# Altium PCB Cat_v1.PcbDoc (part 2 of 2)
Units mil, origin at the board's own origin, x right, y up, seen from the top; angles counter-clockwise.
Board outline 3347.94 x 3903.41 mil, 2 copper layers (Top, Bottom), stack 61.811 mil thick; 108 components, 71 nets, 321 pads, 652 vias.
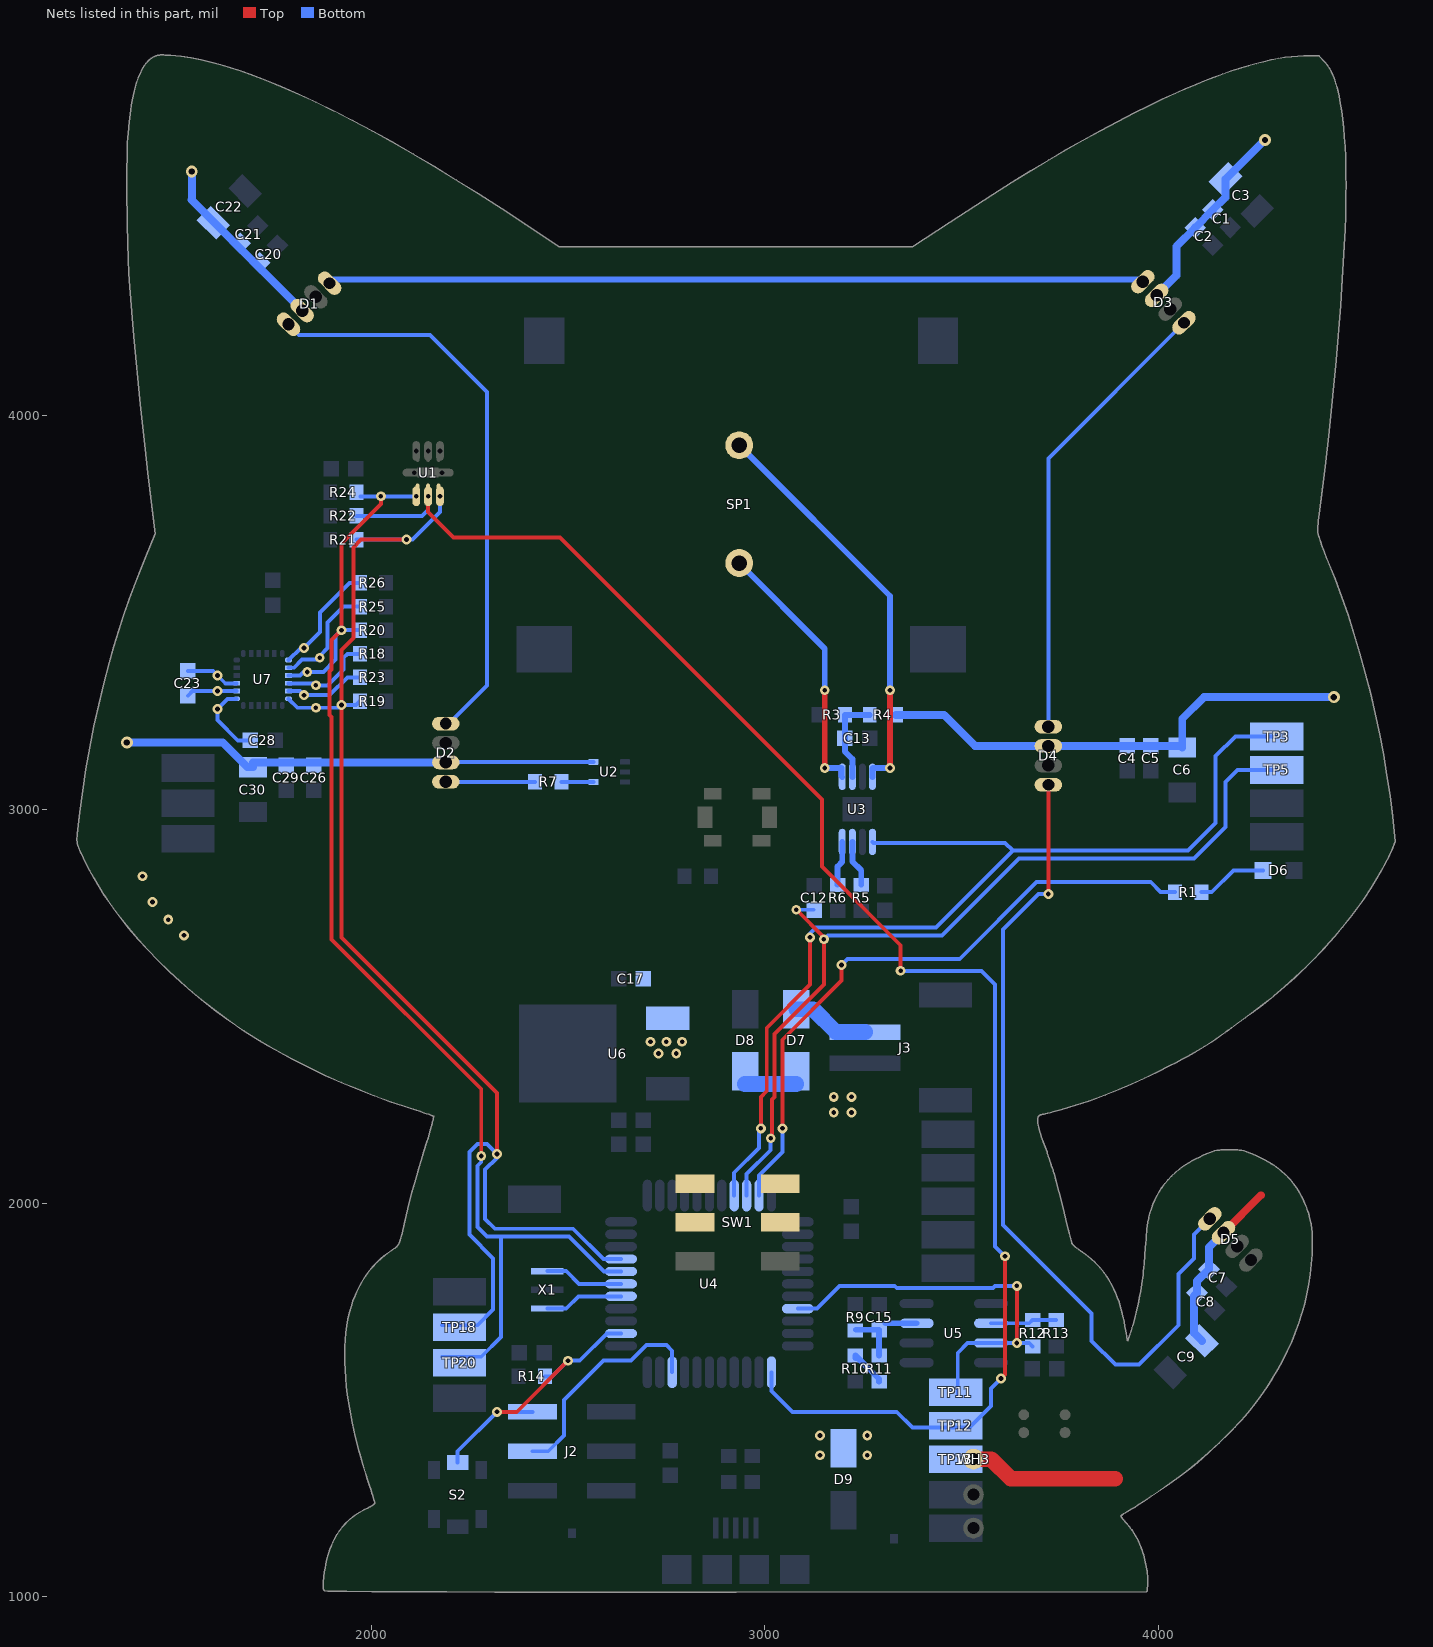
[diagram p2: the nets of this part, all layers, seen from the top]

## Via types
v1: diameter 25, hole 12, Top to Bottom, tented both sides, 618 vias
v2: diameter 25, hole 12, Top to Bottom, tented top, 22 vias
v3: diameter 30, hole 16, Top to Bottom, tented both sides, 4 vias
v4: diameter 35, hole 20, Top to Bottom, tented top, 4 vias
v5: diameter 27.56, hole 27.56, Top to Bottom, tented both sides, 2 vias
v6: diameter 35, hole 20, Top to Bottom, tented both sides, 1 vias
v7: diameter 190, hole 190, Top to Bottom, 1 vias

## Nets (pads, with @x,y where several pads share a name; then routed paths per layer and width w, separated by ;. In a path a pad name is that pad's centre, name@x,y a point inside that pad or via, vN(x,y) a via of type N, cw(c..) or ccw(c..) an arc to the next point about the centre after c; other vN are vias at no path point) (continued)
NetC13_2: C13.2 R3.2 R4.2 U3.6 | length 228.2
  Bottom w10: R3.2@3203.46,3240 R3.2@3203.46,3240
  Bottom w15: R3.2@3203.46,3240 R4.2@3266.54,3240 ; R3.2@3203.46,3240 C13.2@3203.5,3180 3203.5,3146.5 3222.2,3127.8 U3.6@3222.2,3082.68
NetC15_2: C15.2 R9.2 R11.1 U5.3 | length 202.1
  Bottom w15: R9.2@3231.97,1678.5 C15.2@3290,1678.5 R11.1@3290,1613.46 ; C15.2@3306.5,1695 U5.3@3385.51,1695
NetC23_1: C23.1 U7.8 | length 129
  Bottom w10: C23.1@1535,3288.5 1546.97,3300.47 U7.8@1659.06,3300.47
  other v2: 1610,3300.47
NetC23_2: C23.2 U7.9 | length 137
  Bottom w10: C23.2@1535,3351.5 1598.5,3351.5 1629.84,3320.16 U7.9@1659.06,3320.16
  other v2: 1610,3340
NetC28_2: C28.2 U7.7 | length 193
  Bottom w10: U7.7@1659.06,3280.79 1635.79,3280.79 v2(1610,3255) 1610,3226.63 1661.63,3175 C28.2@1693.5,3175
NetD1_1: D1.1 D2.4 | length 1469.2
  Bottom w10: D1.1@1790.45,4231.8 1817.25,4205 2150,4205 2295,4060 2295,3315 D2.4@2190,3210
NetD1_4: D1.4 D3.1 | length 2070.9
  Bottom w15: D1.4@1899.84,4341.2 D1.4@1894.84,4336.2 1903.64,4345 D3.1@3955,4345
NetD2_1: D2.1 R7.2 | length 226.5
  Bottom w10: D2.1@2190,3070 R7.2@2416.54,3070
NetD3_4: D3.4 D4.1 | length 1168.3
  Bottom w10: D4.1@3720,3210 3720,3891.21 D3.4@4064.4,4235.6
NetD4_4: D4.4 D5.1 | length 2157.3
  Top w10: v1(3720,2785) D4.4@3720,3062.36
  Bottom w10: v1(3720,2785) 3695,2785 3605,2695 3605,1945 3830,1720 3830,1650 3890,1590 3950,1590 4050,1690 4050,1820 4090,1860 4090,1920 D5.1@4130,1960
NetD6_A: D6.A R1.1 | length 179.9
  Bottom w10: R1.1@4108.46,2790 4135,2790 4190,2845 D6.A@4265.63,2845
NetD7_A: D7.A J3.2 | length 198.3
  Bottom w40: D7.A@3080,2492.26 3122.74,2492.26 3180.63,2434.37 J3.2@3254.33,2434.37
NetR5_2: R5.2 U3.3 | length 118.3
  Bottom w15: U3.3@3222.2,2917.32 3222.2,2867.8 3245,2845 R5.2@3245,2808.46
NetR6_2: R6.2 U3.4 | length 113.7
  Bottom w15: R6.2@3185,2808.46 3185,2855 3196.61,2866.61 U3.4@3196.61,2917.32
NetR7_1: R7.1 U2.4 | length 80.6
  Bottom w10: R7.1@2484.05,3069.41 U2.4@2564.65,3069.41
NetR10_2: R10.2 R11.2 | length 98.7
  Bottom w15: R10.2@3230,1606.54 R10.2@3230,1613.46 3290,1553.46 R11.2@3290,1546.54
NetR12_1: R12.1 R13.2 U5.6 | length 169
  Bottom w10: U5.6@3574.49,1695 3671.54,1695 R12.1@3680,1703.46 R13.2@3740,1703.46
NetR18_1: R18.1 U7.22 | length 238.4
  Top w10: v2@1860,3310 v2(1860,3315)
  Bottom w10: U7.22@1790.94,3320.16 1854.84,3320.16 v2(1860,3315) 1890,3315 1930,3355 1930,3385 1940,3395 R18.1@1971.54,3395
NetR23_1: R23.1 U7.23 | length 203.6
  Bottom w10: U7.23@1790.94,3300.47 1819.53,3300.47 v2(1830,3290) 1895,3290 1940,3335 R23.1@1971.54,3335
NetR25_1: R25.1 U7.20 | length 286
  Bottom w10: U7.20@1790.94,3359.53 1804.53,3359.53 1825,3380 1865,3380 v2(1870,3385) 1870,3390 1890,3410 1890,3475 1930,3515 R25.1@1971.54,3515
NetR26_1: R26.1 U7.19 | length 291
  Bottom w10: U7.19@1790.94,3379.21 1821.73,3410 v2(1830,3410) 1870,3450 1870,3500 1945,3575 R26.1@1971.54,3575
NetSP1_1: SP1.1 U3.8 | length 1043.8
  Top w15: v1(3317.68,3105) v1(3317.68,3302.32)
  Bottom w15: SP1.1@2935,3924.61 3317.68,3541.93 v1(3317.68,3302.32) ; U3.8@3273.39,3082.68 3273.39,3103.39 3275,3105 v1(3317.68,3105)
NetSP1_2: SP1.2 U3.5 | length 676.5
  Top w15: v1(3152.32,3105) v1(3152.32,3302.32)
  Bottom w15: SP1.2@2935,3625 SP1.2@2935,3625.39 3152.32,3408.07 v1(3152.32,3302.32) ; v1(3152.32,3105) 3195,3105 3195,3084.29 U3.5@3196.61,3082.68
NetU4_16: U4.16 X1.1 | length 199.6
  Bottom w10: X1.1@2448,1732.76 2495.76,1732.76 2526.5,1763.5 U4.16@2634.89,1763.5
NetU4_17: U4.17 X1.3 | length 200.2
  Bottom w10: X1.3@2448,1827.24 2495.76,1827.24 2528,1795 U4.17@2634.89,1795
OPT_INT: pad.1@2145,3795 R22.1 TP12.1 U1.5 U4.1 | length 4104.3
  Top w10: pad.1@2145,3795 2145,3755 2210,3690 2480,3690 3145,3025 3145,2855 3345,2655 v1(3345,2590) ; v1@3600,1550 v1(3600,1555) 3610,1565 v1(3610,1865)
  Bottom w10: R22.1@1963.46,3745 2130,3745 2145,3760 pad.1@2145,3795 ; U4.1@3016.78,1570.59 3016.78,1523.22 3070,1470 3335,1470 3375,1430 3520,1430 3574.5,1484.5 3574.5,1529.5 v1(3600,1555) ; v1(3345,2590) 3550,2590 3585,2555 3585,1890 v1(3610,1865)
RESET: J2.5 R14.1 S2.2 U4.13 | length 732.2
  Top w10: v1(2320,1470) 2370,1470 v1(2500,1600)
  Bottom w10: S2.2@2220,1341.69 2220,1370 v1(2320,1470) J2.5@2410,1470 ; R14.1@2441.46,1560 2460,1560 v1(2500,1600) 2530,1600 2599.02,1669.02 U4.13@2634.89,1669.02
SCK: J2.3 U4.9 | length 580.1
  Bottom w10: J2.3@2410,1370 2450,1370 2490,1410 2490,1500 2590,1600 2660,1600 2700,1640 2750,1640 2764.81,1625.19 U4.9@2764.81,1570.59
SCL: pad.1@2115,3795 R20.1 R24.1 TP20.1 U1.4 U4.18 U7.21 | length 3315.1
  Top w10: v1(2025,3795) 2025,3775 1925,3675 v1(1925,3455) 1900,3430 1900,3355 1895,3350 1895,3240 1900,3235 1900,2670 2280,2290 v1(2280,2120)
  Bottom w10: U7.21@1790.94,3339.84 1819.84,3339.84 1829,3349 v2(1838,3349) 1879,3349 1910,3380 1910,3440 v1(1925,3455) R20.1@1971.54,3455 ; R24.1@1973.46,3795 v1(2025,3795) pad.1@2115,3795 ; TP20.1@2180,1610 2280,1610 2330,1660 2330,1915 ; v1(2280,2120) 2280,2105 2270,2095 2270,1940 2295,1915 2330,1915 ; U4.18@2634.89,1826.5 2591.5,1826.5 2503,1915 2330,1915
SDA: pad.1@2175,3795 R19.1 R21.1 TP18.1 U1.6 U4.19 U7.24 | length 3561.6
  Top w10: v1(2090,3685) 1975,3685 1955,3665 1955,3435 1925,3405 v1(1925,3265) 1925,2675 2320,2280 v1(2320,2125)
  Bottom w10: U7.24@1790.94,3280.79 1813.73,3258 v2(1860,3258) 1918,3258 v1(1925,3265) 1961.54,3265 R19.1@1971.54,3275 ; R21.1@1963.46,3685 v1(2090,3685) 2105,3685 2175,3755 pad.1@2175,3795 ; TP18.1@2180,1690 2270,1690 2310,1730 2310,1860 2250,1920 2250,2130 2270,2150 2295,2150 v1(2320,2125) 2320,2115 2290,2085 2290,1960 2315,1935 2513,1935 2590.01,1857.99 U4.19@2634.89,1857.99
SOUND: R12.2 TP11.1 U4.41 U5.7 | length 1043.3
  Top w10: v1(3640,1645) v1(3640,1790)
  Bottom w10: U4.41@3083.71,1732.01 3132.01,1732.01 3190,1790 3330,1790 3335,1785 3580,1785 3585,1790 v1(3640,1790) ; TP11.1@3490,1510 3490,1620 3515,1645 U5.7@3574.49,1645 v1(3640,1645) 3671.54,1645 R12.2@3680,1636.54
SPEAKER: C12.1 TP5.1 U4.31 | length 2274.8
  Top w10: v1(3015,2165) 3018,2168 3018,2263 3025,2270 3025,2430 3150,2555 v1(3150,2670) 3150,2675 v1(3080,2745)
  Bottom w10: U4.31@2953.79,2019.41 2953.79,2073.79 3015,2135 v1(3015,2165) ; v1(3080,2745) C12.1@3123.5,2745 ; v1(3150,2670) 3160,2680 3450,2680 3645,2875 4090,2875 4170,2955 4170,3070 4200,3100 TP5.1@4300,3100
SPEAKER_EN: TP3.1 U3.1 U4.30 | length 2603
  Top w10: v1(2990,2190) 2990,2270 3005,2285 3005,2445 3115,2555 v1(3115,2675)
  Bottom w10: U4.30@2922.29,2019.41 2922.29,2077.29 2985,2140 2985,2185 v1(2990,2190) ; v1(3115,2675) 3115,2685 3130,2700 3435,2700 3630,2895 ; U3.1@3273.39,2917.32 3275.71,2915 3610,2915 3630,2895 ; TP3.1@4300,3185 4195,3185 4145,3135 4145,2965 4075,2895 3630,2895
USER_LED: R1.2 U4.32 | length 1616.3
  Top w10: v1(3045,2190) 3045,2415 3195,2565 v1(3195,2605)
  Bottom w10: U4.32@2985.28,2019.41 2985.28,2070.28 3045,2130 v1(3045,2190) ; v1(3195,2605) 3210,2620 3495,2620 3690,2815 3980,2815 4005,2790 R1.2@4041.54,2790
VCC: C1.1 C2.1 C3.1 C4.1 C5.1 C6.1 C7.1 C8.1 C9.1 C17.1 C20.1 C21.1 C22.1 C26.1 C29.1 C30.1 D1.2 D2.2 D3.2 D4.2 D5.2 R4.1 SW1.3 SW1.6 TP13.1 U2.5 U6.1 WH3.1 | length 4258
  Top w20: D5.2@4164.8,1925.2 4259.6,2020
  Top w40: WH3.1@3530,1350 3575,1350 3625,1300 3890,1300
  Bottom w10: D2.2@2191.38,3120.59 U2.5@2564.65,3120.59
  Bottom w20: v3(1380,3170) 1623.37,3170 1686.28,3107.09 C30.1@1700,3107.09 ; v3(1545,4620) 1545,4549 1543.92,4547.92 D1.2@1825.25,4266.6 ; C30.1@1700,3119.21 D2.2@2190,3119.21 ; R4.1@3333.46,3240 3455,3240 3534.21,3160.79 D4.2@3720,3160.79 C6.1@4060,3160.79 ; D3.2@3994.8,4305.2 4045,4355.4 4045,4429.54 C2.1@4092.73,4477.27 C1.1@4137.73,4522.27 4169.63,4554.18 C3.1@4169.63,4600.37 4269.27,4700 v3(4270,4700) ; C6.1@4060,3157.09 C6.1@4060,3160.79 ; C9.1@4110.37,1650.37 4090,1670.73 4090,1764.54 C8.1@4097.73,1772.27 4097.73,1802.27 C7.1@4127.73,1832.27 4127.73,1888.13 D5.2@4164.8,1925.2 ; v3(4445,3285) 4115,3285 4060,3230 C6.1@4060,3160.79
  other v1: 2730,2380 2775,2380 2710,2410 2750,2410 2790,2410 1525,2680 1485,2720 1445,2765 1420,2830
VIN: D7.K D8.K D9.K SW1.2 SW1.5 | length 130
  Bottom w40: D8.K@2950,2302.52 D7.K@3080,2302.52
  other v1: 3140,1360 3260,1360 3140,1410 3260,1410 3175,2230 3220,2230 3175,2270 3220,2270
pads on no net: D5.4 J1.4 SW1.1 SW1.4 U1.7 U3.2 U4.2
copper on no net: | length 756.6
  Top w1: 3060.42,4180 ccw(c2940,4180) 3060.42,4180
  other v5: 2844.61,1166.14 3007.99,1166.14
  other v7: 2940,4180

## Polygon pours and split planes (outlines as drawn)
GND on Bottom "GND_L02_P056" (solid, remove dead copper, pour order 62): 1116 vertices, not listed, extent 1256.11,1015.17 4598.35,4912.88
3.3V on Bottom "3.3V_L02_P060" (solid, pour order 60): 1710,3385 1770,3385 1790,3405 1790,3530 1710,3530
GND on Bottom "GND_L02_P059" (solid, pour order 59): 1680,3275 1665,3260 1665,3210 1765,3210 1765,3275
3.3V on Bottom "3.3V_L02_P056" (solid, pour order 56): 2670,2355 2865,2355 2865,2233.76 2745,2113.91 2745,2090 2670,2090
GND on Bottom "GND_L02_P054" (solid, pour order 54): 3300,4275 3300,4100 3575,4100 3575,4275
VCC on Bottom "VCC_L02_P050" (solid, pour order 50): 2860,2525 2860,2670 2684.17,2845.83 1305.83,2845.83 1382.28,2732.39 1549.91,2570.99 1552.03,2765 2625,2765 2675,2715 2675,2525
3.3V on Bottom "3.3V_L02_P042" (solid, pour order 42): 2690,1960 3010,1960 3010,1637.52 2792.48,1637.52 2770,1660 2690,1660
GND on Bottom "GND_L02_P036" (solid, pour order 36): 2330,1130 2110.6,1130 2110.6,1380 2330,1380
GND on Bottom "GND_L02_P034" (solid, pour order 34): 2890,1150 2890,1220 2869.26,1240 2740,1240 2690,1190 2690,1027.32 3270,1027.32 3270,1120.59 2890,1120.59
VCC on Bottom "VCC_L02_P032" (solid, pour order 32): 2860,2550 2670,2550 2670,2365.29 2860,2365.29
VIN on Bottom "VIN_L02_P024" (solid, pour order 24): 2935,2412.61 3140,2412.61 3140,2300 3270,2300 3270,2208.86 2935,2209.42
GND on Bottom "GND_L02_P010" (solid, pour order 10): 2578,1740 2506.72,1668.72 2350,1668.72 2350,1885.92 2507.08,1885.92 2578,1815
5V on Bottom "5V_L02_P014" (solid, pour order 14): 2969,1130 2969,1219.27 2989.85,1240.12 3270,1240.12 3270,1130
VIN on Bottom "VIN_L02_P020" (solid, pour order 20): 3130,1308.75 3270,1308.75 3270,1480 3130,1480
3.3V on Bottom "3.3V_L02_P006" (solid, pour order 6): 2000,3230 2110,3230 2110,3660.7 1940,3660.7 1940,3920 1840,3920 1840,3610 2000,3610
3.3V on Top "3.3V_L01_P008" (solid, pour order 8): 2820,2245 2885,2245 2885,2740.63 2127.34,3498.3 2124.95,3660.69 1980,3660.69 1980.01,3462.32 2504.34,2937.54 2534.12,2909.01 2820,2622.48
GND on Top "GND_L01_P012" (solid, pour order 12): 2796,1024 2796,1688.52 3091,1688.52 3091,1024
VIN on Top "VIN_L01_P010" (solid, pour order 16): 3130,1320 3270,1320 3270,2300 3140,2300 3140,2000 2710,2000 2710,1889.49 3130,1889.49
VCC on Top "VCC_L01_P014" (solid, pour order 22): 3130,2010.03 2690,2010.03 2690,2433.15 2815,2433.15 2815,2142.73 3130,2142.73
GND on Top "GND_L01_P034" (solid, remove dead copper, pour order 46): 484 vertices, not listed, extent 1419.67,1009.54 4436.48,4728.88
VCC on Top "VCC_L01_P036" (solid, remove dead copper, pour order 48): 1116 vertices, not listed, extent 1256.11,1015.17 4598.35,4912.88
no net on Top Solder "Top-No Net" (solid): 3665.54,1042 3878,1042 ccw(c3879.39,1052.84) 3887,1045 ccw(c3862.5,1100.29) 3922.97,1099.82 ccw(c3856.07,1098.58) 3918,1123.92 ccw(c3776.12,1050.19) 3842.98,1195.43 ccw(c3662.39,866.02) 3808.48,1212.12 ccw(c3803.16,1206.92) 3805.4,1214.01 ccw(c3784.57,1148.75) 3748.01,1206.68 ccw(c3751.9,1200.48) 3746.71,1205.64 cw(c3272.23,1685.75) 3718.49,1179.3 cw(c3335.2,1614.2) 3689.64,1155.48 cw(c3546.42,1363.73) 3655.25,1135.62 ccw(c3657.92,1129.9) 3654.61,1135.27 cw(c3639.17,1148.46) 3652.36,1133.02 ccw(c3707.06,1088.84) 3646.8,1052.6 ccw(c3665.54,1063.87)
no net on Top Solder "Top-No Net" (solid): 1979.87,1043.1 2192.03,1043.1 ccw(c2191.93,1070.06) 2211.03,1051.03 ccw(c2132.24,1089.68) 2217.76,1109.38 ccw(c2168.69,1099.91) 2194,1143 cw(c2304.97,1355.26) 2145,1177 cw(c2589.58,1687.81) 2110.34,1209.36 cw(c2112.97,1221.17) 2105.84,1211.4 ccw(c2089.39,1188.94) 2100.56,1214.44 ccw(c2073.51,1152.93) 2049.5,1215.69 ccw(c2051.65,1208.75) 2046.43,1213.8 ccw(c2191.37,870.02) 2011.93,1197.12 ccw(c2083.86,1050.17) 1936.9,1122.1 ccw(c1995.98,1103.04)

## Keep-outs
Keep-Out Layer:
  lines w30: 2660,1010 3250,1010
  lines w50: 1883.13,1018.67 cw(c1890.43,1023.16) 1881.86,1023.2 cw(c1932.78,1028.11) 1881.63,1027.36 cw(c1985.58,1029.12) 1881.67,1032.65 cw(c2054.07,1026.95) 1882,1038.97 cw(c2130.05,1021.75) 1882.61,1046.2 cw(c2204.2,1014.49) 1883.5,1054.26 cw(c2268.51,1006.56) 1884.69,1063.04 cw(c2334.63,996.68) 1887.97,1082.34 cw(c2130.35,1036.69) 1898.05,1119.59 cw(c2096.2,1048.39) 1904.97,1136.49 cw(c2072.97,1059.46) 1922.42,1166.67 cw(c2054.64,1072.69) 1986.36,1219.84 ccw(c1909.66,1384.2) 1998.55,1226.09 ccw(c1931.7,1344.59) 2002.03,1228.13 ccw(c1948.47,1316.88) 2005.13,1230.08 ccw(c1966.4,1289.48) 2007.8,1231.9 ccw(c1983.2,1266.2) 2009.96,1233.56 ccw(c1996.87,1249.63) 2011.58,1235.03 ccw(c2006.21,1240.47) 2012.59,1236.26 ccw(c2011.03,1237.37) 2012.94,1237.23 ccw(c1991.3,1234.9) 2012.2,1240.98 ; 1897.66,1017.83 1938,1017.13 ; 1943.34,1013.38 ccw(c1956.31,1112.33) 1957.87,1012.54 1998.21,1011.84 2062.17,1011.25 2147.58,1010.79 2252.25,1010.44 2374,1010.19 2510.64,1010.05 2660,1010 ; 3250,1010 3702.24,1010.45 3702.78,1009.91 3968.04,1010.18 3969.78,1034.44 ccw(c3879.73,1040.41) 3969.94,1043.1 ccw(c3818.12,1038.85) 3969.33,1053.08 ccw(c3749.36,1032.56) 3968.02,1064.07 ccw(c3650.01,1017.39) 3960.66,1099.89 ccw(c3652.98,1018.76) 3957.3,1111.71 ccw(c3699.61,1033.09) 3953.6,1122.95 ccw(c3793.29,1067.33) 3945.49,1142.36 ccw(c3823.56,1080.65) 3943.29,1146.51 ccw(c3783.97,1058.93) 3940.79,1150.91 ccw(c3723.15,1022.68) 3928.97,1169.15 ccw(c3743.19,1037.07) 3925.85,1173.43 ccw(c3774.85,1060.75) 3922.79,1177.42 ccw(c3829.72,1104.57) 3917.07,1184.18 cw(c4075.42,1330.17) 3911.98,1189.91 cw(c4058.81,1315.89) 3909.66,1192.65 cw(c4036.53,1297.51) 3907.55,1195.27 cw(c4008.29,1275.16) 3905.66,1197.7 cw(c3977.88,1252.24) 3904.05,1199.91 cw(c3949.47,1232.16) 3902.73,1201.86 cw(c3926.61,1217.39) 3901.75,1203.48 cw(c3906.32,1206.48) 3900.92,1205.61 cw(c3902.62,1205.51) 3901.15,1206.37 cw(c3906.29,1203.55) 3901.81,1207.33 cw(c3913.08,1197.98) 3902.87,1208.48 cw(c3922.78,1188.12) 3904.29,1209.78 cw(c3934.48,1174.49) 3906.03,1211.2 cw(c3946.75,1158.71) 3908.06,1212.71
  lines w60: 2012.2,1240.98 ccw(c1869.61,1204.83) 2011.32,1244.29 2010.14,1248.43 2008.69,1253.29 2007,1258.78 2005.1,1264.79 2003.03,1271.22 1998.46,1284.96 1993.28,1300.75 1990.48,1309.63 1987.61,1318.91 cw(c3759.47,1862.65) 1976.53,1356.4 1974.15,1364.95 1972.02,1372.79 cw(c3090.94,1675.63) 1943.09,1514.02 cw(c2727.41,1621.48) 1937,1577.11 cw(c2544.56,1611.38) 1936.5,1635.14 cw(c2404.7,1616.96) 1941.58,1688.07 cw(c2303.31,1632.58) 1952.22,1735.85 cw(c2235.62,1652.45) 1968.43,1778.47 cw(c2196.59,1670.71) 1990.19,1815.87 cw(c2181.24,1681.2) 2050.37,1874.87 ccw(c1871.77,2148.52) 2062.99,1883.53 ccw(c2037.8,1917.19) 2067.45,1887.38 ccw(c2043.97,1910.3) 2074.19,1897.52 ccw(c2004.08,1928.41) 2077.08,1905.16 ccw(c1895.1,1963.55) 2080.06,1915.41 ccw(c1541.05,2056.63) 2083.43,1928.97 2087.49,1946.49 2092.56,1968.67 cw(c3981.3,1536.64) 2100.44,2001.77 cw(c3709.24,1603.01) 2113.45,2051.03 2118.49,2068.69 2124.03,2087.53 2130.17,2107.9 2137.01,2130.11 2144.63,2154.51 ccw(c1109.05,2480.17) 2150.9,2175.16 2153.62,2184.66 2156.03,2193.43 2158.07,2201.31 ccw(c1819.99,2286.44) 2159.73,2208.17 ccw(c1972.66,2251.4) 2160.95,2213.87 ccw(c2080.34,2230.11) 2161.71,2218.25 ccw(c2139.64,2221.69) 2161.97,2221.18 ccw(c2159.97,2221.47) 2161.7,2222.52 ccw(c2150.13,2202.93) 2157.49,2224.45 ccw(c2082.15,2033.45) 2153.27,2226.06 2147.82,2228.04 2141.27,2230.34 2133.77,2232.91 2125.44,2235.7 2116.43,2238.67 2096.9,2244.96 cw(c2650.97,3985.65) 1761.18,2390.26 cw(c2495.05,3696.3) 1718.55,2415.15 cw(c2409.17,3554.8) 1678.14,2440.63 cw(c2311.29,3405.82) 1640.26,2466.57 cw(c2453.22,3607.34) 1461.39,2618.14 cw(c2301.49,3453.76) 1387.37,2699.83 cw(c2190.69,3361.22) 1354.8,2741.5 cw(c2107.89,3299.91) 1325.42,2783.47 cw(c2021.1,3242.71) 1299.39,2825.56 cw(c1933.11,3191.93) 1276.89,2867.59 cw(c2403.11,3427.76) 1266.38,2889.23 cw(c1535.45,3015.9) 1262.73,2897.3 cw(c1390.98,2953.18) 1260,2904.04 cw(c1331.45,2930.87) 1258.09,2909.82 cw(c1307.2,2923.87) 1256.89,2915 cw(c1306,2923.31) 1256.23,2925.07 cw(c1360.24,2922.05) 1256.54,2930.71 cw(c1563.66,2905.28) 1257.15,2937.24 cw(c3871.58,2674.83) 1338.09,3371.61 cw(c3568.03,2755.77) 1403.86,3573.25 cw(c3391.16,2820.75) 1429.34,3637.38 1455.35,3699.84 1451.52,3730.12 1436.13,3855.47 1429.29,3914.46 1416.94,4028.76 1400.62,4202.13 1395.46,4263.39 1390.31,4327.62 cw(c3210.4,4459.18) 1386.63,4396.64 1385.24,4439.52 1384.18,4485.43 1383.12,4578.63 cw(c6011.72,4595.32) 1383.16,4622.07 1383.63,4660.84 cw(c2953.5,4633.14) 1384.52,4693.02 cw(c1934.72,4673.36) 1385.88,4716.69 cw(c2339.94,4638.18) 1392.49,4775.01 cw(c2016.5,4683.66) 1396.7,4800.22 cw(c1853.94,4714.34) 1401.53,4822.82 cw(c1727.94,4744.67) 1406.98,4842.83 cw(c1633.29,4773.72) 1413.05,4860.25 cw(c1565.12,4800.62) 1419.75,4875.11 cw(c1518.8,4824.45) 1427.09,4887.43 cw(c1489.94,4844.32) 1435.06,4897.21 cw(c1474.37,4859.34) 1443.68,4904.48 cw(c1487.92,4840.47) 1450.74,4908.82 cw(c1467.1,4877.95) 1453.99,4910.33 cw(c1465.37,4881.9) 1461,4912.21 cw(c1467.81,4866.06) 1465.17,4912.63 cw(c1469.64,4833.98) 1470.07,4912.76 cw(c1469.34,4762.06) 1475.92,4912.62 cw(c1462.03,4590.3) 1482.91,4912.24 1491.27,4911.66 cw(c1434.63,4265.98) 1617.86,4887.7 cw(c1311.6,3810.05) 1691.35,4864.05 cw(c1163.94,3398.44) 1771.55,4832.66 cw(c949.69,2891.24) 1858.4,4793.56 cw(c658.97,2281.37) 1951.83,4746.78 cw(c282.59,1562.57) 2051.78,4692.34 cw(c-187.85,729.4) 2158.2,4630.29 cw(c-759.94,-222.68) 2271,4560.65 cw(c-1440.43,-1297.35) 2390.14,4483.45 2477.03,4425.91 2926.6,4425.91 3376.17,4425.91 3471.66,4488.64 3579.55,4558.44 3629.32,4589.76 3676.88,4619.04 3722.66,4646.52 cw(c5726.76,1265.03) 3810.58,4697.1 cw(c5610.08,1471.16) 3939.83,4765.88 cw(c5036.27,2611.16) 4045.29,4816.37 cw(c4827.53,3071.72) 4094.73,4837.71 cw(c4708.36,3359.21) 4141.83,4856.39 cw(c4607.59,3625.86) 4186.48,4872.37 cw(c4525.78,3868.45) 4228.56,4885.63 cw(c4462.83,4084.41) 4267.97,4896.11 cw(c4417.96,4271.96) 4304.6,4903.79 cw(c4389.73,4430.19) 4338.34,4908.63 cw(c4376.05,4559.07) 4369.08,4910.59 ; 3731.17,2234.72 ccw(c3459.91,3240.98) 3771.86,2246.58 ; 3731.18,2234.72 3723.87,2232.8 3717.18,2231.11 3711.26,2229.71 cw(c3663.3,2438.74) 3706.25,2228.62 cw(c3686.79,2323.13) 3702.29,2227.89 ccw(c3703.81,2214.51) 3691.39,2219.7 ccw(c3712.71,2211.08) 3689.74,2212.17 ccw(c3738.78,2209.51) 3690.12,2202.84 ccw(c3788.69,2215.93) 3692.17,2192.05 ccw(c3873.62,2236.54) 3695.49,2180.18 ccw(c4023.85,2283.73) 3699.73,2167.59 ccw(c4376.81,2409.89) 3704.51,2154.64 3709.45,2141.68 3714.17,2129.1 ccw(c3763.94,2136.95) 3715.81,2122.05 ccw(c3881.43,2170.33) 3717.24,2117.41 3718.95,2112.21 3720.88,2106.6 3722.95,2100.7 3725.06,2094.68 3727.14,2088.65 3729.1,2082.77 cw(c3451.9,1991.98) 3730.88,2077.17 cw(c3128.12,1895.93) 3734.88,2063.27 3737.33,2054.33 3740.01,2044.36 3742.86,2033.57 3745.82,2022.16 3757.65,1974.78 3765.59,1942.04 3767.97,1932.31 3770.15,1923.45 3772.08,1915.61 3773.74,1908.96 3775.07,1903.65 3776.04,1899.86 ccw(c3863.28,1922.29) 3776.62,1897.74 ccw(c3786.22,1901.28) 3778.38,1894.69 ccw(c3803.24,1913.97) 3779.98,1892.79 ccw(c3818.53,1927.79) 3781.99,1890.7 ccw(c3834.98,1944.42) 3784.36,1888.46 ccw(c3850.36,1961.38) 3787.04,1886.12 ccw(c3862.59,1975.87) 3789.99,1883.72 ccw(c3872.02,1987.9) 3799.92,1876.61 cw(c3676.96,1684.97) 3883.68,1780.44 cw(c3627.82,1659.32) 3892.67,1759.27 cw(c3590.94,1645.42) 3900.3,1736.53 cw(c3541.39,1630.82) 3906.59,1712.17 cw(c3477.09,1616.49) 3911.57,1686.17 ccw(c4899.83,1845.18) 3914.63,1668.17 3915.59,1662.94 3916.5,1658.24 3917.32,1654.15 3918.06,1650.76 ccw(c4005.67,1670.48) 3918.69,1648.15 ccw(c3943.92,1654.5) 3919.2,1646.4 ccw(c3921.64,1647.04) 3919.56,1645.61 ccw(c3916.25,1654.49) 3925.72,1654.33 ccw(c3742.67,1728.51) 3930.2,1666.52 ccw(c3481.57,1816.32) 3935.24,1682.57 ccw(c3177.09,1906.81) 3940.57,1701.45 ccw(c2951.94,1967.78) 3945.92,1722.16 ccw(c2960.83,1966.49) 3955.56,1764.96 ccw(c3288.08,1899.88) 3959.3,1785.01 ccw(c3561.09,1853.56) 3961.96,1802.81 ccw(c3230.86,1891.8) 3963.58,1817.38 3964.46,1826.16 3965.36,1835.69 3966.25,1845.76 3969.52,1887.47 3970.17,1897.26 cw(c4921.12,1838.47) 3971.92,1920.85 cw(c4526.95,1872.03) 3972.91,1930.98 cw(c4376.99,1888.01) 3974,1940.19 cw(c4279.93,1900.58) 3975.2,1948.61 cw(c4218.02,1910.33) 3976.56,1956.38 cw(c4180.54,1917.46) 3978.08,1963.63 cw(c4160.06,1922.11) 3983.85,1983.68 cw(c4213.16,1904.77) 3998.45,2017.52 cw(c4178.05,1922.92) 4017.41,2047.02 cw(c4178.6,1921.57) 4054.99,2084.17 cw(c4202.83,1891.09) 4070.18,2094.9 cw(c4222.7,1860.52) 4086.78,2104.91 cw(c4247.12,1816.6) 4104.87,2114.25 cw(c4413.62,1477.16) 4123.21,2122.82 cw(c4204.14,1941.13) 4130.4,2125.85 cw(c4172.11,2021.4) 4136.77,2128.17 cw(c4161.75,2052.54) 4142.72,2129.88 cw(c4161.35,2052.65) 4154.85,2131.83 cw(c4167.02,1990.57) 4161.8,2132.26 cw(c4172.6,1841.46) 4169.86,2132.45 4179.41,2132.49 cw(c4182.21,1668.46) 4197.07,2132.26 cw(c4191.9,1992.74) 4204.05,2131.83 cw(c4196.32,2043.73) 4210.32,2131.05 cw(c4198.04,2055.78) 4222.34,2128.07 cw(c4185.03,2016.27) 4228.88,2125.67 cw(c4149.85,1928.38) 4236.29,2122.54 cw(c4043.65,1689.29) 4244.98,2118.57 4255.33,2113.67 cw(c4127.23,1842.83) 4284.51,2097.84 cw(c4158.27,1894.25) 4297.45,2089.22 cw(c4177.98,1921.37) 4320.37,2070.27 cw(c4182.93,1927.69) 4356.02,2023.91 cw(c4142.18,1903.53) 4363.17,2010.21 cw(c4115.82,1889.56) 4373.96,1984.97 cw(c4172.45,1910.87) 4381.47,1959.95 cw(c4163.02,1909.16) 4385.97,1933.55 cw(c4110.95,1903.09) 4387.17,1919.33 cw(c4044.13,1899.18) 4387.73,1904.16 cw(c3939.14,1897.65) 4387.67,1887.84 cw(c3775.82,1901.19) 4387.02,1870.17 ; 3908.06,1212.71 cw(c3958.01,1143.05) 3910.34,1214.29 cw(c3972.06,1121.75) 3918.32,1219.14 ccw(c3724.45,1567.46) 3930.58,1226.25 ccw(c3523.91,1900.98) 3945.21,1235.29 3961.69,1245.89 3979.45,1257.67 ccw(c2802.99,3008.09) 4016.64,1283.24 4034.96,1296.28 4052.37,1308.99 ccw(c3468.7,2101.64) 4082.23,1331.87 ccw(c3558.63,1983.39) 4097.66,1344.58 ccw(c3294.56,2290.69) 4177.3,1418.41 ccw(c3382.46,2204.73) 4191.99,1433.54 ccw(c3513.7,2079.86) 4205.69,1448.23 ccw(c3749.68,1866.53) 4229.13,1475.32 ccw(c3608.35,1978.22) 4256.83,1511.59 ccw(c3660.03,1942.45) 4324.43,1625.6 ccw(c3744.35,1904.37) 4387.03,1870.17 ; 3771.86,2246.58 3820.95,2262.02 ; 3771.86,2246.58 3820.95,2262.02 ; 3820.95,2262.02 ccw(c3288.95,3780.43) 3862.94,2277.39 ccw(c3342.25,3645.89) 4026.16,2351.22 4042.59,2359.62 4058.3,2367.92 ccw(c3537.02,3339.9) 4087.89,2384.38 ccw(c3654.57,3138.64) 4166.76,2435.55 4171.4,2438.93 4176.87,2442.91 4183.03,2447.4 4189.76,2452.28 4219.37,2473.78 4233.84,2484.28 ccw(c3491.41,3500.16) 4444.77,2678.99 ccw(c3581.34,3424.11) 4502.59,2751.79 ccw(c3745.92,3304.79) 4551.24,2825.39 ccw(c3649.43,3358.42) 4569.77,2858.06 4574.01,2865.95 4577.94,2873.42 4581.47,2880.33 4584.53,2886.53 ccw(c4427.21,2963.65) 4588.92,2896.22 4598.23,2919.16 4591.31,2981.44 ccw(c2057.7,2689.11) 4493.11,3446.32 ccw(c2482.49,2824.76) 4427.42,3628.62 4423.08,3639.22 cw(c5310.49,3996.89) 4415.11,3659.67 4411.59,3669.2 4408.46,3678.05 cw(c4852.48,3831.72) 4405.77,3686.04 cw(c4691.96,3779.49) 4403.58,3693.03 cw(c4559.18,3739.83) 4401.95,3698.84 cw(c4436.02,3708.95) 4400.58,3706.29 cw(c4456.33,3705.68) 4400.69,3709.23 cw(c4598.53,3697.35) 4401,3713.59 4401.5,3719.21 4402.16,3725.95 4402.97,3733.63 4403.91,3742.12 4404.96,3751.24 4408.65,3780.89 ccw(c-4411.21,4931.06) 4448.11,4140.22 4459.4,4279.87 4463.92,4347.02 ccw(c-1327.99,4712.17) 4470.52,4473.77 ccw(c1486.43,4595.66) 4472.48,4539.61 ccw(c2068.54,4584.94) 4472.86,4600.6 ccw(c2593.17,4588.58) 4471.67,4656.56 ccw(c3052.55,4605.47) 4468.93,4707.34 ccw(c3441.42,4633.73) 4464.66,4752.78 ccw(c3757.44,4670.82) 4458.88,4792.72 ccw(c4001.45,4713.59) 4451.6,4827 ccw(c4177.58,4758.35) 4442.86,4855.46 ccw(c4332.68,4819) 4421.02,4894.26 ; 4369.08,4910.59 4421.02,4894.26 ; 4369.08,4910.59 4405.17,4911.22 4421.02,4894.26

## Other copper
Bottom:
  rectangle net GND: 3280,2210 3335,2370
  rectangle net GND: 3115,2970 3355,3030
  pour cut-out: 2940,4059.58 cw(c2940,4180) 2819.58,4180 cw(c2940,4180) 2940,4300.42 cw(c2940,4180) 3060.42,4180 cw(c2940,4180)

## Silkscreen, mask and mechanical layers (free items; w line width, h text height)
Top Overlay:
  circle w8: c3631,1489 r5
  circle w8: c2050,3140 r450.11
  circle w8: c3800,3140 r450.11
  circle w8: c3720,3140 r310
  circle w8: c2126.81,3142.14 r310
  lines w8: 2012.2,1240.98 ccw(c1980.19,1361.1) 2023.92,1244.73 cw(c2045.11,1134.52) 2046.56,1246.74 cw(c2045.36,1139.43) 2061.49,1245.53 cw(c2047.16,1151.94) 2068.63,1244.15 cw(c2049.66,1162.6) 2075.45,1242.26 cw(c2053.26,1173.65) 2081.85,1239.85 cw(c2060.11,1188.75) 2093.03,1233.47 ccw(c2574.75,1720.96) 2121.59,1206.81 ccw(c2510.59,1648.24) 2150.98,1182.56 ccw(c2455.08,1574.17) 2246.96,1124.14 ccw(c2459.49,1587.38) 2320.31,1097.09 ccw(c2481.79,1663.2) 2360.65,1087.11 ccw(c2510.38,1808.7) 2450.05,1074.21 ; 2436.33,1731.9 2576.3,1174.44 ; 2439.95,1020 cw(c2658.63,1004.33) 2455.09,1085.79 cw(c2620.85,1018.4) 2464.78,1105.93 cw(c2601.06,1029.53) 2476.9,1124.37 cw(c2585.94,1041.08) 2491.53,1140.64 cw(c2576.55,1050.62) 2576.3,1174.44 ; 2921.54,1591.71 2923.02,1016.4 ; 3277.34,1175.65 3412.49,1727.08 ; 3404.98,1064.21 ccw(c3344.65,1798.7) 3494.39,1077.11 ccw(c3373.25,1653.2) 3534.72,1087.09 ccw(c3395.54,1577.38) 3608.07,1114.14 ccw(c3399.95,1564.17) 3704.06,1172.56 ccw(c3344.44,1638.24) 3733.44,1196.81 ccw(c3280.28,1710.96) 3762,1223.47 cw(c3794.93,1178.75) 3773.19,1229.85 cw(c3801.78,1163.65) 3779.58,1232.26 cw(c3805.37,1152.6) 3786.4,1234.15 cw(c3807.87,1141.94) 3793.55,1235.53 cw(c3809.68,1129.43) 3808.47,1236.74 cw(c3809.93,1124.52) 3831.11,1234.73 cw(c3778.81,962.62) 3849.57,1230.53 cw(c3793.3,1018.65) 3857.92,1228.13 cw(c3802.07,1047.08) 3865.72,1225.54 cw(c3810.12,1069.66) 3873.01,1222.74 cw(c3817.35,1087.24) 3879.8,1219.75 cw(c3823.63,1100.58) 3886.14,1216.55 cw(c3830.88,1113.81) 3897.58,1209.52 cw(c3835.54,1120.69) 3902.73,1205.69 ; 3411.43,1013.6 ccw(c3040.42,996.52) 3409.42,1038.7 ccw(c3133.12,1007.2) 3405.67,1062.48 ccw(c3199.36,1020.7) 3399.89,1084.68 ccw(c3244.65,1035.18) 3391.85,1105.07 ccw(c3285.8,1056.43) 3351.4,1152.91 ccw(c3284.46,1052.67) 3331.61,1163.6 ccw(c3268.22,1009.62) 3280.96,1175.65 2576.3,1174.44
Bottom Overlay:
  lines w8: 1328.25,3333.43 ccw(c2210.47,3110.19) 1306.27,3007.35 ccw(c2164.37,3102.01) 1338.77,2849.66 ccw(c2059.83,3071.24) 1365.58,2776.23 ccw(c1979.7,3037.03) 1399.3,2707.94 ; 1387.28,4637.27 cw(c1661.88,4593.16) 1392.2,4661.15 cw(c1632.69,4600.58) 1452.4,4770.87 cw(c1685.5,4555.06) 1472.83,4791.03 cw(c1723.09,4513.32) 1496.49,4810.65 cw(c1682.96,4541.86) 1553.43,4842.26 cw(c1655.06,4603.51) 1580.68,4852.1 cw(c1647.28,4628.21) 1706.86,4854.08 ; 1414.44,4165.28 ccw(c2916.19,4485.43) 1439.59,4064.22 ccw(c3133.49,4546.18) 1454.23,4015.47 ccw(c3337.59,4610.71) 1469.93,3967.88 ccw(c3617.72,4707.15) 1486.49,3921.41 ccw(c4311.54,4965.91) 1521.27,3831.78 1511.64,3812.4 1501.94,3793.04 1492.25,3773.68 1482.61,3754.3 1473.09,3734.86 1463.75,3715.34 1454.65,3695.71 ; 1923.13,4744.17 cw(c577.87,2716.85) 1984.9,4701.8 cw(c-141.98,1700.03) 2048.06,4656.03 2111.88,4608.09 2175.6,4559.2 2238.48,4510.6 2299.78,4463.5 2358.74,4419.13 2477.06,4424.45 ; 2071,3330 2111,3276 ; 2073,3392 2122,3330 ; 3376.19,4424.45 3497.21,4422.35 ccw(c-493.89,9910.93) 3595.35,4495.07 3643.44,4531.52 3690.62,4567.54 3736.7,4602.78 3781.49,4636.87 3824.78,4669.46 3866.39,4700.19 3906.12,4728.68 ; 4103.51,4839.85 cw(c4202.39,4602.83) 4274.97,4849.17 cw(c4187.86,4541.78) 4297.96,4841.71 cw(c4172.38,4499.63) 4319.06,4833.2 cw(c4144.11,4435.42) 4338.18,4824.23 cw(c4079.46,4306.12) 4355.21,4815.37 cw(c4245.5,4631.28) 4428.95,4742.06 cw(c4209.76,4607.75) 4443.97,4713.71 cw(c4178.05,4593.35) 4455.15,4685.1 cw(c4143.1,4581.7) 4463.04,4657.24 ; 4393.42,3707.55 4384.27,3728.73 4375,3750.08 4365.66,3771.45 4356.34,3792.72 4337.97,3834.42 ccw(c3138.06,4327.4) 4359.94,3891.72 ccw(c2893.43,4414.92) 4380.18,3952.34 ccw(c2324.64,4578.87) 4460.93,4346.37 ; 4411.98,2645.67 ccw(c3972.91,2981.75) 4454.51,2710.1 ccw(c3881.19,3033.72) 4489.28,2781.42 ccw(c3653.12,3115.21) 4550.96,3182.04
Bottom Solder:
  rectangle: 3135,2965 3335,3035
  lines w10: 1610,3255 1635,3280 1660,3280 ; 1610,3300.47 1659.53,3300.47 ; 1610,3340 1630,3320 1660,3320 ; 1640,3455 1675,3420 1675,3396 ; 1676,3264 1676,3235 1685,3226 1696,3226 1696,3265 ; 1685,3460 1696,3449 1696,3393 ; 1715,3396 1715,3445 1730,3460 ; 1735,3265 1735,3225 1747,3225 1755,3233 1755,3264 ; 1735,3394 1735,3455 ; 1755,3396 1755,3440 1775,3460 1775,3396 ; 1790,3282 1814,3258 1853,3258 1860,3265 ; 1790,3300 1820,3300 1830,3290 ; 1790,3320 1855,3320 ; 1790,3340 1820,3340 1830,3350 ; 1791,3379 1822,3410 ; 1795,3360 1805,3360 1825,3380 1860,3380 ; 1730,3460 1735,3455 ; 1730,3460 1735,3455 ; 1822,3410 1830,3410 1822,3410 ; 1855,3320 1860,3315 ; 1855,3320 1860,3315 ; 1855,3320 1860,3315
  lines w15: 1715,3225 1715,3265
Dimension:
  lines w15: 1979,1050 2167,1050 ccw(c2165.69,1071.2) 2180.47,1086.44 ; 1979,1051 cw(c1998.53,1101.49) 1948.04,1121.02 cw(c2085.96,1049.21) 2021.26,1190.61 cw(c2199.29,866.18) 2057.93,1208.18 ; 1995.04,1075 2150,1075 cw(c2268.65,1306.98) 2120.84,1092.4 cw(c2480.46,1558.08) 2091.45,1116.65 ccw(c2001.5,1025.9) 2083.05,1124.27 ccw(c2067.16,1108.11) 2051,1124 ; 1995.04,1075.2 cw(c2001.34,1104.67) 1977.82,1123.5 cw(c2102.96,1031.21) 2038.26,1172.61 cw(c2216.29,848.18) 2050.49,1179.02 cw(c2069.97,1120.76) 2108,1169 cw(c2038.45,1061.81) 2128.4,1152.56 ccw(c2517.41,1593.98) 2157.79,1128.3 ccw(c2305.6,1342.89) 2193.38,1107.73 ccw(c2346.8,1362.23) 2233.31,1087.59 ccw(c2464.16,1576.61) 2310.52,1058.12 ; 2057.75,1208.74 cw(c2076.29,1150.61) 2108.84,1202.22 ccw(c2590.57,1689.71) 2137.4,1175.56 ccw(c2526.41,1616.98) 2166.79,1151.3 ccw(c2314.6,1365.89) 2202.38,1130.73 ccw(c2355.8,1385.23) 2242.31,1110.59 ccw(c2473.16,1599.61) 2439.62,1059.88 ; 2070,1100 2016,1100 cw(c2019.29,1113.71) 2012.13,1125.85 cw(c2114.96,1009.21) 2050.26,1150.61 cw(c2071.41,1103.23) 2083.26,1153.74 cw(c2062.97,1095.76) 2101,1144 cw(c2031.45,1036.81) 2121.4,1127.56 ccw(c2510.41,1568.98) 2150.79,1103.3 ccw(c2298.6,1317.89) 2179.95,1085.91 ; 2203,1102 cw(c2175.13,1073.37) 2206,1048 ; 3407,1064 ccw(c3349.49,1736.71) 3498.94,1078.29 ccw(c3377.8,1654.38) 3539.28,1088.27 ccw(c3400.1,1578.56) 3612.63,1115.33 ccw(c3404.51,1565.36) 3708.61,1173.75 ccw(c3349,1639.42) 3738,1198 ccw(c3284.84,1712.15) 3766.56,1224.66 cw(c3805.43,1167.06) 3856.86,1213.78 ; 3525,1059 ccw(c3397.84,1584.61) 3628.69,1095.59 ccw(c3515.2,1370.23) 3668.62,1115.73 ; 3654,1052 cw(c3693.17,1076.55) 3668.62,1115.73 ; 3703,1074.38 3856,1074.38 ccw(c3854.22,1107.98) 3884.65,1122.33 ccw(c3460.69,913.22) 3838.37,1197.51 ccw(c3806.84,1168.2) 3777.53,1199.73 cw(c3295.8,1687.22) 3748.97,1173.07 cw(c3359.97,1614.5) 3719.58,1148.82 cw(c3559.17,1340.08) 3668.62,1115.73 ; 3703.96,1075.07 ccw(c3584.17,1294.08) 3744.58,1102.82 ccw(c3384.97,1568.5) 3773.97,1127.07 ccw(c3320.8,1641.22) 3802.53,1153.73 cw(c3683.64,1052.07) 3821.83,1125.38 ; 3800,1116 3781,1099 3839,1099 ccw(c3837.24,1116.42) 3853.4,1123.17 ; 3853.06,1123.04 ccw(c3706.71,1067.78) 3825.6,1169.44 ccw(c3804.13,1153.57) 3785.53,1172.73 cw(c3303.8,1660.22) 3756.97,1146.07 cw(c3367.97,1587.5) 3727.58,1121.82 cw(c3567.17,1313.08) 3686.96,1094.07 ccw(c3698.73,1073.55) 3696.52,1050 3865,1050 ccw(c3863.62,1104.28) 3914.5,1123.24 ccw(c3488.32,918.71) 3857.33,1214.16
Mechanical 2:
  drawing of 955 lines, arcs and shapes, not listed
Cat Outline:
  drawing of 383 lines, arcs and shapes, not listed
Dog Outline:
  drawing of 361 lines, arcs and shapes, not listed
Dog Silkscreen:
  drawing of 257 lines, arcs and shapes, not listed
Cat Silkscreen:
  drawing of 457 lines, arcs and shapes, not listed
Board Outline:
  drawing of 383 lines, arcs and shapes, not listed
Mechanical 15:
  lines w2: 3485,1149.57 3485,1094.57 ccw(c3520,1094.57) 3520,1059.57 3730,1059.57 ccw(c3730,1094.57) 3765,1094.57 3765,1379.57 ccw(c3730,1379.57) 3730,1414.57 3520,1414.57 ccw(c3520,1379.57) 3485,1379.57 3485,1324.57 ; 3575,1195.43 3575,1140.43 cw(c3540,1140.43) 3540,1105.43 3330,1105.43 cw(c3330,1140.43) 3295,1140.43 3295,1425.43 cw(c3330,1425.43) 3330,1460.43 3540,1460.43 cw(c3540,1425.43) 3575,1425.43 3575,1370.43
  lines w10: 1690,2575 1690,4075 4190,4075 4190,2575 1690,2575

## Text inside footprints (layer, text, board x,y; h text height)
J2: Bottom Overlay "1" at 2375,1221 h40 r90; Bottom Overlay "2" at 2670,1229 h40 r90; Bottom Overlay "5" at 2388,1528 h40 r90; Bottom Overlay "6" at 2668,1534 h40 r90
J3: Bottom Overlay "-" at 3200,2290 h40; Bottom Overlay "+" at 3160,2480 h40 r270